# EAGLE board PCB_Docdocil_Geal (EAGLE 9.7.0)
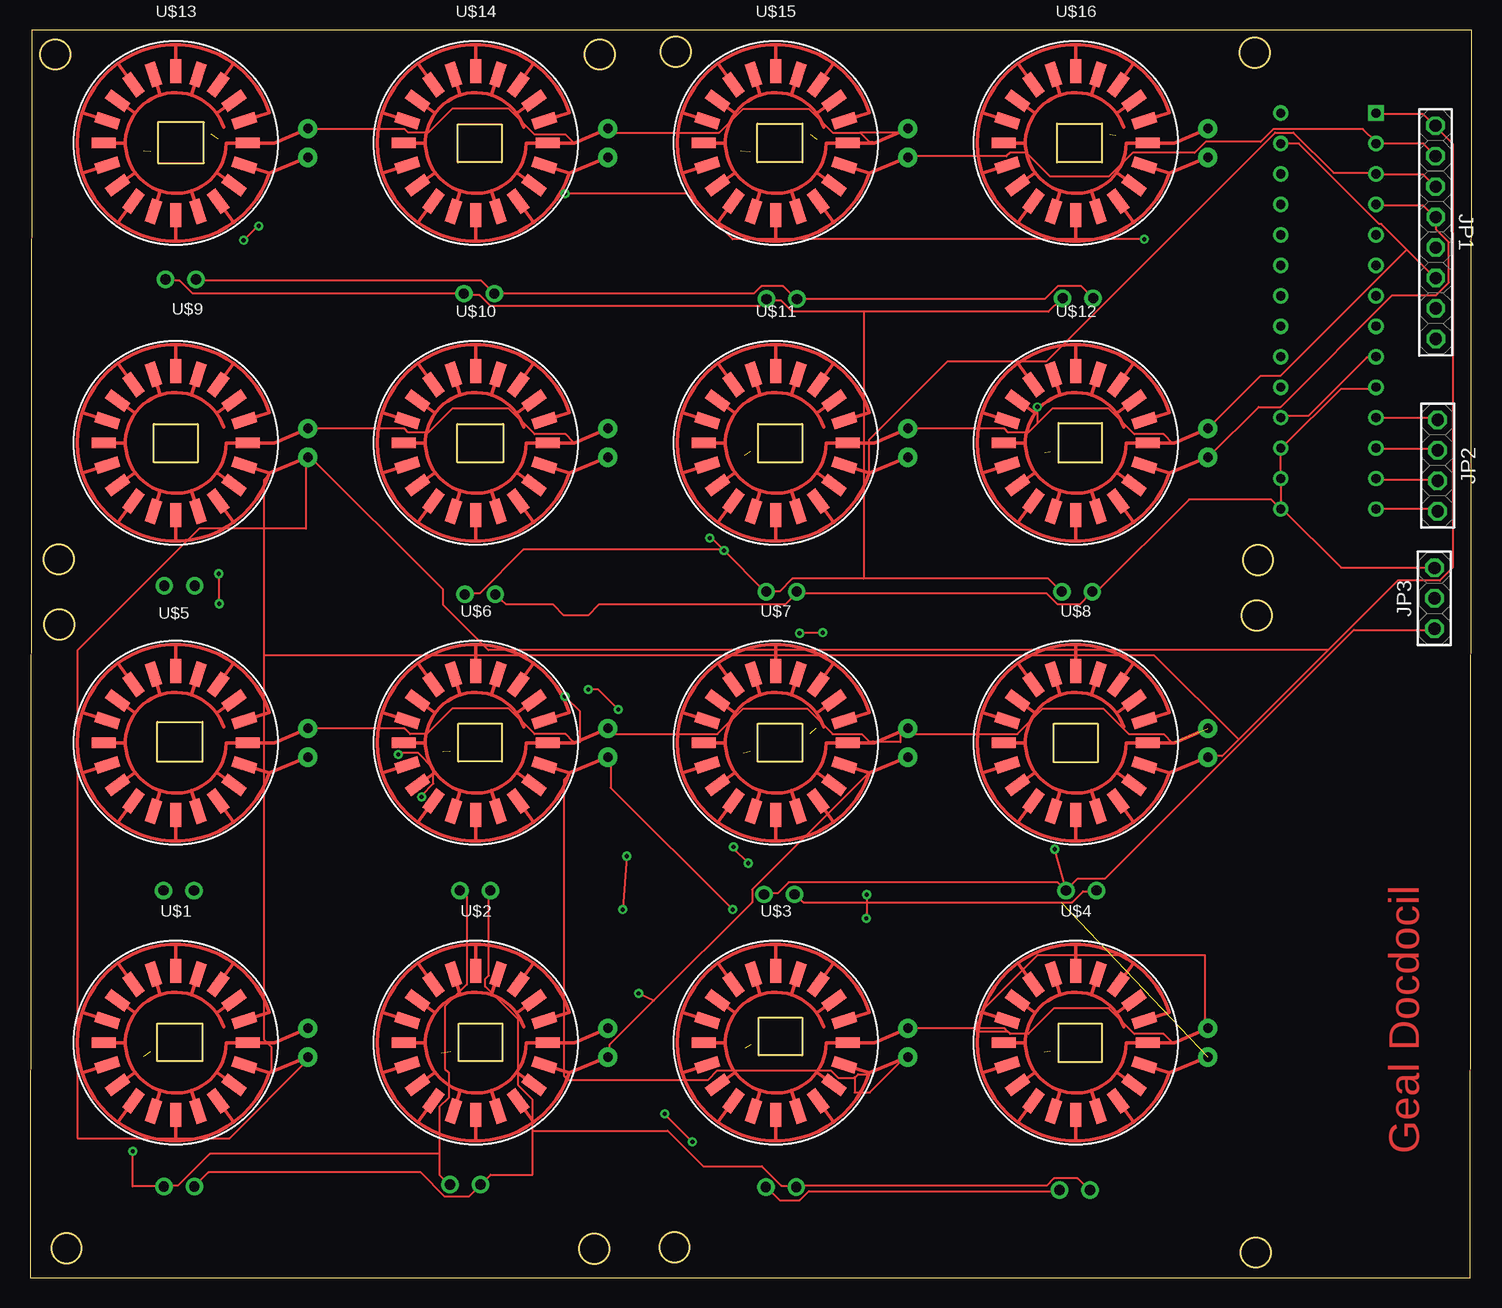
[diagram p0: board, top side]
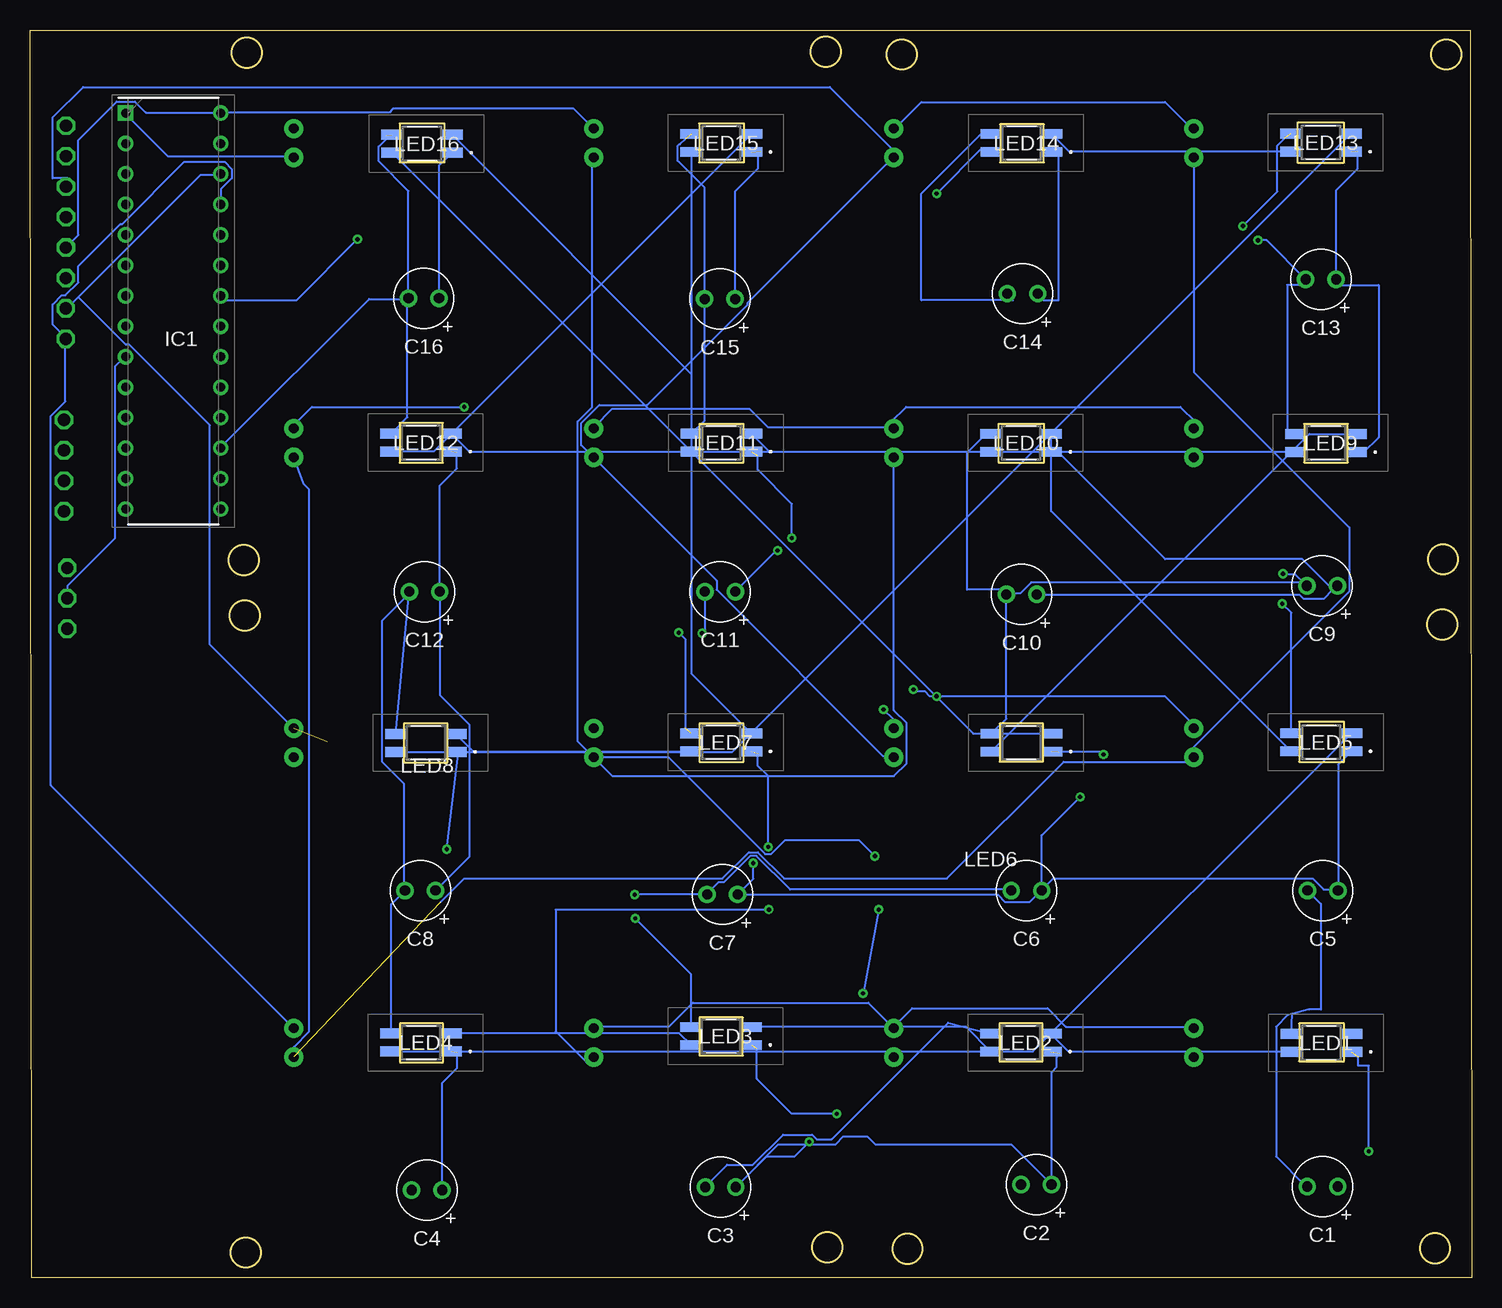
[diagram p1: board, bottom side, seen from below]

Size 120.13 x 104 mm. Coordinates in mm from the lower left corner, seen from the top.
Outline: 0,0 120,0 120.13,104 0.13,104 0,0
Outline: 10.66,96.29 10.66,92.91 14.49,92.91 14.49,96.29 10.66,96.29
Outline: 35.65,96.14 39.29,96.14 39.29,92.96 35.65,92.96 35.65,96.14
Outline: 60.62,96.2 64.38,96.2 64.38,92.96 60.62,92.96 60.62,96.2
Outline: 85.59,96.2 89.33,96.2 89.33,92.96 85.59,92.96 85.59,96.2
Outline: 89.33,71.23 89.33,67.94 85.73,67.94 85.73,71.23 89.33,71.23
Outline: 88.97,46.18 88.97,42.95 85.33,42.95 85.33,46.18 88.97,46.18
Outline: 85.71,21.17 89.31,21.17 89.31,17.95 85.71,17.95 85.71,21.17
Outline: 64.35,21.68 64.35,18.51 60.73,18.51 60.73,21.68 64.35,21.68
Outline: 35.75,21.17 39.36,21.17 39.36,18.03 35.75,18.03 35.75,21.17
Outline: 10.62,21.17 14.37,21.17 14.37,18.03 10.62,18.03 10.62,21.17
Outline: 10.62,46.33 14.37,46.33 14.37,42.99 10.62,42.99 10.62,46.33
Outline: 35.7,46.18 39.32,46.18 39.32,43.02 35.7,43.02 35.7,46.18
Outline: 60.66,46.18 64.35,46.18 64.35,43 60.66,43 60.66,46.18
Outline: 10.31,71.16 13.96,71.16 13.96,67.95 10.31,67.95 10.31,71.16
Outline: 35.62,71.16 39.43,71.16 39.43,67.95 35.62,67.95 35.62,71.16
Outline: 60.67,71.16 64.35,71.16 64.35,67.95 60.67,67.95 60.67,71.16
Outline: circle at 2.1,101.96 radius 1.25
Outline: circle at 47.49,101.96 radius 1.25
Outline: circle at 53.82,102.18 radius 1.25
Outline: circle at 102.07,102.11 radius 1.25
Outline: circle at 102.33,59.82 radius 1.25
Outline: circle at 102.24,55.2 radius 1.25
Outline: circle at 102.15,2.08 radius 1.25
Outline: circle at 3.04,2.43 radius 1.25
Outline: circle at 2.39,59.88 radius 1.25
Outline: circle at 2.45,54.43 radius 1.25
Outline: circle at 47.01,2.4 radius 1.25
Outline: circle at 53.71,2.51 radius 1.25
Copper layers (1*16): Top / Bottom
Stack-up Default Layer Stack: Top SilkScreen Epoxy Ink / Top SolderMask SR:Green 0.0254mm Dk 4.3 / Top Surface Finish Lead-Free 0.02mm / Top CuFoil:007 0.035mm / Dielectric-1 User Defined 1.5mm / Bottom CuFoil:007 0.035mm / Bottom Surface Finish Lead-Free 0.02mm / Bottom SolderMask SR:Green 0.0254mm Dk 4.3 / Bottom SilkScreen Epoxy Ink
Design rules: minimum copper width 6mil, minimum drill size 0.35mm, copper clearance wire_polygon to wire_polygon 6mil, copper clearance wire_polygon to pad_smd 6mil, copper clearance wire_polygon to via 6mil, copper clearance pad_smd to pad_smd 6mil, copper clearance pad_smd to via 6mil, copper clearance via to via 6mil, copper clearance smd to pad (same net) 6mil, copper clearance smd to via (same net) 6mil, copper clearance smd to smd (same net) 6mil, dimension clearance 40mil, via restrict clearance 0mil, restrict clearance 0mil, drill distance 6mil, keepout clearance 0mil

## Footprints (pad centres in the part's own frame; a part is rotated, then mirrored left to right if it is on the bottom)
CAPPRD254W65D500H1150B = drill 0.85 pad 1.45: 1 -1.27,0; 2 1.27,0
DIP794W56P254L3486H508Q28N = drill 0.759 pad 1.159 square: 1 -3.969,16.51 | drill 0.759 pad 1.159: 2 -3.969,13.97; 3 -3.969,11.43; 4 -3.969,8.89; 5 -3.969,6.35; 6 -3.969,3.81; 7 -3.969,1.27; 8 -3.969,-1.27; 9 -3.969,-3.81; 10 -3.969,-6.35; 11 -3.969,-8.89; 12 -3.969,-11.43; 13 -3.969,-13.97; 14 -3.969,-16.51; 15 3.969,-16.51; 16 3.969,-13.97; 17 3.969,-11.43; 18 3.969,-8.89; 19 3.969,-6.35; 20 3.969,-3.81; 21 3.969,-1.27; 22 3.969,1.27; 23 3.969,3.81; 24 3.969,6.35; 25 3.969,8.89; 26 3.969,11.43; 27 3.969,13.97; 28 3.969,16.51
1X08 = drill 1.016 octagon: 1 -8.89,0; 2 -6.35,0; 3 -3.81,0; 4 -1.27,0; 5 1.27,0; 6 3.81,0; 7 6.35,0; 8 8.89,0
1X04 = drill 1.016 octagon: 1 -3.81,0; 2 -1.27,0; 3 1.27,0; 4 3.81,0
1X03 = drill 1.016 octagon: 1 -2.54,0; 2 0,0; 3 2.54,0
SK6812MINIE = smd 1.8 x 0.82: 1 -2.5,0.75; 2 -2.5,-0.75; 3 2.5,-0.75; 4 2.5,0.75
RUBBER_RING_BUTTON = smd 2 x 0.9: 1_1 6,0; 1_6 -6,0 | smd 2 x 0.9 rotated 324: 1_2 4.854,-3.527 | smd 2 x 0.9 rotated 288: 1_3 1.854,-5.706 | smd 2 x 0.9 rotated 252: 1_4 -1.854,-5.706 | smd 2 x 0.9 rotated 216: 1_5 -4.854,-3.527 | smd 2 x 0.9 rotated 144: 1_7 -4.854,3.527 | smd 2 x 0.9 rotated 108: 1_8 -1.854,5.706 | smd 2 x 0.9 rotated 72: 1_9 1.854,5.706 | smd 2 x 0.9 rotated 36: 1_10 4.854,3.527 | drill 0.8 pad 1.6: 1_11 11,1.2; 2_11 11,-1.2 | smd 2 x 0.9 rotated 342: 2_1 5.706,-1.854 | smd 2 x 0.9 rotated 306: 2_2 3.527,-4.854 | smd 0.9 x 2: 2_3 0,-6; 2_8 0,6 | smd 2 x 0.9 rotated 234: 2_4 -3.527,-4.854 | smd 2 x 0.9 rotated 198: 2_5 -5.706,-1.854 | smd 2 x 0.9 rotated 162: 2_6 -5.706,1.854 | smd 2 x 0.9 rotated 126: 2_7 -3.527,4.854 | smd 2 x 0.9 rotated 54: 2_9 3.527,4.854 | smd 2 x 0.9 rotated 18: 2_10 5.706,1.854

## Placement (x,y rotation side)
C1  [CAPPRD254W65D500H1150B]  12.43,7.59 180 bottom
C2  [CAPPRD254W65D500H1150B]  36.27,7.74 180 bottom
C3  [CAPPRD254W65D500H1150B]  62.59,7.54 180 bottom
C4  [CAPPRD254W65D500H1150B]  87.06,7.29 180 bottom
C5  [CAPPRD254W65D500H1150B]  12.4,32.26 180 bottom
C6  [CAPPRD254W65D500H1150B]  37.09,32.26 180 bottom
C7  [CAPPRD254W65D500H1150B]  62.43,31.94 180 bottom
C8  [CAPPRD254W65D500H1150B]  87.61,32.26 180 bottom
C9  [CAPPRD254W65D500H1150B]  12.46,57.67 180 bottom
C10  [CAPPRD254W65D500H1150B]  37.5,56.95 180 bottom
C11  [CAPPRD254W65D500H1150B]  62.62,57.18 180 bottom
C12  [CAPPRD254W65D500H1150B]  87.25,57.18 180 bottom
C13  [CAPPRD254W65D500H1150B]  12.56,83.2 180 bottom
C14  [CAPPRD254W65D500H1150B]  37.43,82.02 180 bottom
C15  [CAPPRD254W65D500H1150B]  62.64,81.57 180 bottom
C16  [CAPPRD254W65D500H1150B]  87.32,81.64 180 bottom
IC1  MCP23S17-E_SP  [DIP794W56P254L3486H508Q28N]  108.2,80.57 0 bottom
JP1  PINHD-1X8  [1X08]  117.14,87.14 270.1 top
JP2  PINHD-1X4  [1X04]  117.3,67.69 270 top
JP3  PINHD-1X3  [1X03]  117.03,56.62 90 top
LED1  SK6812MINI-E  [SK6812MINIE]  12.52,19.57 180 bottom
LED2  SK6812MINI-E  [SK6812MINIE]  37.57,19.58 180 bottom
LED3  SK6812MINI-E  [SK6812MINIE]  62.55,20.13 180 bottom
LED4  SK6812MINI-E  [SK6812MINIE]  87.54,19.59 180 bottom
LED5  SK6812MINI-E  [SK6812MINIE]  12.53,44.62 180 bottom
LED6  SK6812MINI-E  [SK6812MINIE]  37.51,44.59 180 bottom
LED7  SK6812MINI-E  [SK6812MINIE]  62.53,44.62 180 bottom
LED8  SK6812MINI-E  [SK6812MINIE]  87.14,44.57 180 bottom
LED9  SK6812MINI-E  [SK6812MINIE]  12.13,69.57 180 bottom
LED10  SK6812MINI-E  [SK6812MINIE]  37.53,69.58 180 bottom
LED11  SK6812MINI-E  [SK6812MINIE]  62.52,69.59 180 bottom
LED12  SK6812MINI-E  [SK6812MINIE]  87.53,69.61 180 bottom
LED13  SK6812MINI-E  [SK6812MINIE]  12.56,94.61 180 bottom
LED14  SK6812MINI-E  [SK6812MINIE]  37.5,94.58 180 bottom
LED15  SK6812MINI-E  [SK6812MINIE]  62.53,94.58 180 bottom
LED16  SK6812MINI-E  [SK6812MINIE]  87.46,94.52 180 bottom
U$1  MIDI_B_RING  [RUBBER_RING_BUTTON]  12.15,19.58 0 top
U$2  MIDI_B_RING  [RUBBER_RING_BUTTON]  37.15,19.58 0 top
U$3  MIDI_B_RING  [RUBBER_RING_BUTTON]  62.15,19.58 0 top
U$4  MIDI_B_RING  [RUBBER_RING_BUTTON]  87.15,19.58 0 top
U$5  MIDI_B_RING  [RUBBER_RING_BUTTON]  12.15,44.58 0 top
U$6  MIDI_B_RING  [RUBBER_RING_BUTTON]  37.15,44.58 0 top
U$7  MIDI_B_RING  [RUBBER_RING_BUTTON]  62.15,44.58 0 top
U$8  MIDI_B_RING  [RUBBER_RING_BUTTON]  87.15,44.58 0 top
U$9  MIDI_B_RING  [RUBBER_RING_BUTTON]  12.15,69.58 0 top
U$10  MIDI_B_RING  [RUBBER_RING_BUTTON]  37.15,69.58 0 top
U$11  MIDI_B_RING  [RUBBER_RING_BUTTON]  62.15,69.58 0 top
U$12  MIDI_B_RING  [RUBBER_RING_BUTTON]  87.15,69.58 0 top
U$13  MIDI_B_RING  [RUBBER_RING_BUTTON]  12.15,94.58 0 top
U$14  MIDI_B_RING  [RUBBER_RING_BUTTON]  37.15,94.58 0 top
U$15  MIDI_B_RING  [RUBBER_RING_BUTTON]  62.15,94.58 0 top
U$16  MIDI_B_RING  [RUBBER_RING_BUTTON]  87.15,94.58 0 top

## Library data of the parts
C1-C16 = Tinkercad
IC1 = MCP23S17-E_SP; ARROW_PART_NUMBER: MCP23S17-E/SP; ARROW_PRICE-STOCK: https://www.arrow.com/en/products/mcp23s17-esp/microchip-technology?utm_currency=USD&region=europe; DESCRIPTION: Microchip MCP23S17-E/SO, 16-channel 16bit I/O Expander 5MHz, Serial-SPI, 28-Pin SOIC; HEIGHT: 5.08mm; MANUFACTURER_NAME: Microchip; MANUFACTURER_PART_NUMBER: MCP23S17-E/SP; MOUSER_PART_NUMBER: 579-MCP23S17-E/SP; MOUSER_PRICE-STOCK: https://www.mouser.co.uk/ProductDetail/Microchip-Technology/MCP23S17-E-SP?qs=usxtMOJb1RyzobAZrBjFZA%3D%3D
JP1 = Connector; CATEGORY: Connectors; DESCRIPTION: Header-Straight-8 Position; PACKAGE_TYPE: Through Hole; PITCH: 0.100" (2.54mm); SUBCATEGORY: Headers; TYPE: Male Pins
JP2 = Connector; CATEGORY: Connectors; DESCRIPTION: Header-Straight-4 Position; PACKAGE_TYPE: Through Hole; PITCH: 0.100" (2.54mm); SUBCATEGORY: Headers; TYPE: Male Pins
JP3 = Connector; CATEGORY: Connectors; DESCRIPTION: Header-Straight-3 Position; PACKAGE_TYPE: Through Hole; PITCH: 0.100" (2.54mm); SUBCATEGORY: Headers; TYPE: Male Pins
LED1-LED16 = SK6812MINI-E; DESCRIPTION: 3.2x2.8x1.78 mm 0.2W Intelligent external control surface mount SMD LED (MSL:5a); HEIGHT: 1.88mm; MANUFACTURER_NAME: Yellow Stone Corp.; MANUFACTURER_PART_NUMBER: SK6812MINI-E
U$1-U$16 = rubber_ring_button(F)

## Nets
+3.3V: IC1.9 IC1.18 JP3.2
+5V: C1.1 C2.1 C3.1 C4.1 C5.1 C6.1 C7.1 C8.1 C9.1 C10.1 C11.1 C12.1 C13.1 C14.1 C15.1 C16.1 JP3.1 LED1.1 LED2.1 LED3.1 LED4.1 LED5.1 LED6.1 LED7.1 LED8.1 LED9.1 LED10.1 LED11.1 LED12.1 LED13.1 LED14.1 LED15.1 LED16.1
CS: IC1.11 JP2.1
GND: C1.2 C2.2 C3.2 C4.2 C5.2 C6.2 C7.2 C8.2 C9.2 C10.2 C11.2 C12.2 C13.2 C14.2 C15.2 C16.2 IC1.10 IC1.15 IC1.16 IC1.17 JP3.3 LED1.3 LED2.3 LED3.3 LED4.3 LED5.3 LED6.3 LED7.3 LED8.3 LED9.3 LED10.3 LED11.3 LED12.3 LED13.3 LED14.3 LED15.3 LED16.3
GPA1: IC1.22 LED14.4
GPA4: IC1.25 JP1.8 U$1.1_11 U$2.1_11 U$3.1_11 U$4.1_11
GPA5: IC1.26 JP1.7 U$5.1_11 U$6.1_11 U$7.1_11 U$8.1_11
GPA6: IC1.27 JP1.6 U$9.1_11 U$10.1_11 U$11.1_11 U$12.1_11
GPA7: IC1.28 JP1.5 U$13.1_11 U$14.1_11 U$15.1_11
GPB0: IC1.1 JP1.1 U$1.2_11 U$8.2_11 U$9.2_11 U$16.2_11
GPB1: IC1.2 JP1.2 U$2.2_11 U$7.2_11 U$10.2_11 U$15.2_11
GPB2: IC1.3 JP1.3 U$3.2_11 U$6.2_11 U$11.2_11 U$14.2_11
GPB3: IC1.4 JP1.4 U$4.2_11 U$5.2_11 U$12.2_11 U$13.2_11
N$1: LED1.4 LED2.2
N$2: LED2.4 LED3.2
N$3: LED3.4 LED4.2
N$4: LED5.4 LED10.2
N$5: LED10.4 LED11.2
N$6: LED11.4 LED16.2
N$7: LED6.4 LED9.2
N$8: LED9.4 LED12.2
N$9: LED12.4 LED15.2
N$10: LED7.4 LED8.2
N$11: LED8.4 LED13.2
N$12: LED13.4 LED14.2
N$13: LED7.2 LED15.4
N$14: LED6.2 LED16.4
N$15: LED4.4 LED5.2
SCK: IC1.12 JP2.2
SI: IC1.13 JP2.3
SO: IC1.14 JP2.4

## Tracks (layer width: path | path; a pad name or v marks a point on that pad's centre or on a via)
+3.3V
  Top 0.152: IC1.18 104.38,71.82 106.51,71.82 111.39,76.7 112.15,76.7 IC1.9
  Bottom 0.152: JP3.2 117.02,56.73 117.02,57.65 113.06,61.61 113.06,75.93 112.3,76.7 IC1.9
+5V  (via drill 0.35)  (10 unrouted)
  Top 0.152: C13.1 11.41,83.1 12.48,83.1 13.54,82.03 36.1,82.03 C14.1 36.25,81.88 37.47,81.88 38.39,80.96 60.79,80.96 61.25,81.42 C15.1 61.4,81.42 62.62,81.42 63.53,80.51 69.48,80.51 | 69.48,58.25 84.87,58.25 85.93,57.19 C12.1 | 69.48,58.25 63.53,58.25 62.47,57.19 61.4,57.19 C11.1 61.25,57.19 57.76,60.67 41.11,60.67 37.47,57.04 36.25,57.04 C10.1 | 69.48,80.51 84.87,80.51 85.93,81.57 C16.1 | 69.48,80.51 69.48,58.25 | C7.1 61.25,32.04 62.31,32.04 63.23,32.96 85.63,32.96 86.24,32.35 C8.1 | JP3.1 117.02,53.99 110.32,53.99 89.59,33.26 87.31,33.26 86.39,32.35 C8.1 | C4.1 85.78,7.2 64.9,7.2 64.14,6.44 62.47,6.44 61.4,7.51 C3.1 | 34.12,10.31 14.98,10.31 12.33,7.66 11.26,7.66 C1.1 8.56,7.59 v8.56,10.53 | C2.1 34.88,7.81 34.12,8.57 34.12,10.31 | 34.12,10.31 34.12,14.21 34.88,14.97 34.88,17.11 34.58,17.41 34.58,22.59 36.4,24.42 36.4,31.74 35.95,32.19 C6.1 | C8.1 v85.39,35.71 | v32.63,40.06 32.63,40.2 33.61,41.18 33.61,42.46 32.36,43.71 30.79,43.71 v30.68,43.6 | v30.68,43.6 | v57.83,60.6 56.8,61.64 v56.64,61.64 | v59.86,34.54 58.62,35.78 v58.62,35.91 | v55.2,11.31 52.9,13.61 v52.9,13.65
  Bottom 0.152: 11.56,57.34 11.26,57.65 C9.1 11.56,57.34 | 11.56,57.34 12.33,56.58 14,56.58 14.31,56.88 36.1,56.88 C10.1 | C6.1 35.8,32.35 34.88,33.26 13.24,33.26 12.33,32.35 11.26,32.35 C5.1 11.13,42.77 LED5.1 | C6.1 35.95,32.19 36.86,31.28 38.84,31.28 39.45,31.89 61.09,31.89 C7.1 59.86,33.24 v59.86,34.54 | C8.1 86.24,32.35 83.5,35.09 83.5,46.06 85.93,48.5 85.93,57.04 C12.1 85.99,66.02 84.56,67.45 84.56,68.79 | LED9.1 9.02,68.77 7.75,70.04 7.75,82.74 11.56,82.74 C13.1 11.29,90.63 9.49,92.42 9.49,93.87 9.47,93.89 | 11.56,57.34 14.1,59.88 25.53,59.88 34.42,68.77 LED10.1 | LED14.1 34.42,94.17 34.42,81.47 35.69,81.47 C14.1 | v8.56,10.53 8.56,17.65 9.45,17.65 9.45,18.39 | 34.26,18.68 34.58,18.37 34.58,17.55 35,17.12 C2.1 38.35,11.1 49.69,11.1 50.35,11.75 52.35,11.75 53.01,11.1 57.76,11.1 C3.1 58.75,10.11 56.4,10.11 v55.2,11.31 | 59.57,19.11 59.57,16.58 56.64,13.65 v52.9,13.65 | 84.53,18.78 84.54,18.76 84.54,17.46 85.79,16.22 C4.1 | v85.39,35.71 84.5,43.3 LED8.1 | C15.1 61.37,90.56 59.45,92.48 59.45,93.89 59.25,93.89 | C6.1 35.82,36.86 v32.63,40.06 | v30.68,43.6 30.89,43.82 34.39,43.82 | C11.1 57.93,60.6 v57.83,60.6 | v56.64,61.64 56.64,64.49 59.5,67.35 59.5,68.52 | v58.62,35.91 58.62,41.79 59.49,42.66 59.49,43.66 59.45,43.7 59.44,43.7 | LED16.1 86.05,92.67 C16.1
CS
  Top 0.152: IC1.11 112.3,71.67 117.02,71.67 117.18,71.51 JP2.1
GND  (via drill 0.35)  (4 unrouted)
  Top 0.152: C8.2 88.83,32.19 87.76,32.19 86.85,31.28 64.45,31.28 63.84,31.89 C7.2 | C4.2 88.22,7.35 87.31,8.27 85.33,8.27 84.72,7.66 63.99,7.66 C3.2 63.84,7.66 62.62,7.66 60.98,9.29 56.09,9.29 53.14,12.24 41.89,12.24 | C1.2 14.86,8.76 32.56,8.76 34.58,6.74 36.56,6.74 37.47,7.66 C2.2 37.62,7.81 38.39,8.57 41.89,8.57 41.89,12.24 | 41.89,12.24 41.89,14.82 40.67,16.04 40.67,21.53 37.93,24.27 37.93,24.88 38.23,25.18 38.23,32.19 C6.2 | C13.2 13.85,83.1 37.62,83.1 C14.2 38.84,82.03 60.33,82.03 60.94,82.64 62.77,82.64 63.84,81.57 C15.2 63.99,81.57 84.56,81.57 85.63,82.64 87.61,82.64 88.53,81.72 C16.2 | IC1.15 104.22,64.2 104.22,66.48 IC1.16 104.22,66.64 104.22,69.08 IC1.17 104.38,69.23 109.25,74.1 112.15,74.1 IC1.10 | JP3.3 109.25,59.17 104.38,64.05 IC1.15 | C10.2 39.69,56.12 43.59,56.12 44.5,55.21 46.5,55.21 47.42,56.12 62.92,56.12 63.84,57.04 C11.2 63.99,57.04 84.72,57.04 85.63,56.12 87.46,56.12 88.37,57.04 C12.2 88.91,57.19 96.59,64.87 103.42,64.87 IC1.15 | v69.74,31.92 69.74,29.97 v69.69,29.93 | v17.8,86.47 18.99,87.66 v19.06,87.66 | v15.77,56.16 15.77,58.61 v15.72,58.67 | v64.13,53.71 64.17,53.75 v66.06,53.75
  Bottom 0.152: C6.2 38.39,32.35 56.8,32.35 59.6,35.15 60.11,35.15 62.3,32.96 62.77,32.96 63.68,32.04 C7.2 69.72,31.94 v69.74,31.92 | C1.2 13.85,7.66 16.29,10.1 16.29,20.92 15.32,21.89 14.93,21.99 | C10.2 38.69,57.04 37.62,57.04 36.71,57.95 14,57.95 13.85,57.8 13.85,57.79 | 13.85,57.79 C9.2 | 88.68,81.57 91.88,81.57 104.22,69.23 IC1.17 | 88.68,81.57 C16.2 88.59,90.58 91.09,93.07 91.09,94.27 90.5,94.86 90.5,95.2 | LED9.3 15.37,70.04 15.37,82.74 14.1,82.74 C13.2 17.09,86.47 v17.8,86.47 | LED10.3 40.77,70.04 42.04,68.77 42.04,57.34 38.23,57.34 C10.2 | LED14.3 40.77,95.44 45.85,90.36 45.85,81.47 38.23,81.47 C14.2 | LED2.3 43.62,21.25 53.34,11.52 54.6,11.52 54.6,11.56 54.95,11.91 57.37,11.91 59.89,9.4 62.05,9.4 63.63,7.81 C3.2 | LED3.3 65.05,25.28 v69.69,29.93 | LED4.3 90.04,31.11 C8.2 88.98,32.35 88.98,41.19 90.81,43.01 90.81,54.75 88.53,57.04 C12.2 LED8.3 | C5.2 12.56,31.16 12.56,22.34 13.57,22.34 14.93,21.99 | LED1.3 14.93,21.99 | v19.06,87.66 16.19,90.53 16.19,94.36 15.65,94.9 15.65,94.95 | 65.54,94.9 65.98,94.47 66.02,94.47 66.16,94.34 66.16,93.09 63.91,90.85 C15.2 63.91,71.45 LED11.3 | LED12.3 88.68,71.71 88.68,81.57 | LED6.3 38.77,46.57 C10.2 | LED5.3 15.03,55.42 v15.77,56.16 | v15.72,58.67 14.72,58.67 13.85,57.79 | C11.2 63.89,53.94 v64.13,53.71 | v66.06,53.75 65.52,53.21 65.52,45.83
GPA1  (via drill 0.35)
  Top 0.152: v44.58,90.36 54.74,90.36 58.55,86.55 v92.84,86.55
  Bottom 0.152: v44.58,90.36 40.77,94.17 LED14.4 | v92.84,86.55 97.92,81.47 104.27,81.47 IC1.22
GPA4
  Top 0.152: 81.44,20.54 81.67,20.31 83.19,20.31 85.33,22.44 89.9,22.44 92.03,20.31 94.47,20.31 95.23,19.55 95.35,19.58 | 81.44,20.54 81.21,20.76 73.29,20.76 U$3.1_11 | 81.44,20.54 81.41,20.51 78.87,20.51 78.87,21.78 83.95,26.86 97.92,26.86 97.92,20.51 U$4.1_11
  Bottom 0.152: IC1.25 104.22,89.5 104.22,90.72 103.31,91.63 103.31,92.39 103.92,93 107.27,93 112.45,87.82 112.6,87.82 116.11,84.32 116.11,82.94 117.18,81.88 117.48,81.88 118.24,81.11 118.24,79.44 117.18,78.37 JP1.8 117.18,78.22 117.18,73.04 118.4,71.82 118.4,41.03 98.28,20.92 U$4.1_11 | U$1.1_11 23.3,20.92 33.81,20.92 35.34,22.44 46.62,22.44 48.14,20.92 U$2.1_11 48.29,20.92 50.27,22.9 64.9,22.9 66.88,20.92 73.13,20.92 U$3.1_11
GPA5  (via drill 0.35)  (1 unrouted)
  Top 0.152: U$5.1_11 23.3,45.76 31.22,45.76 31.68,45.3 33.05,45.3 35.19,47.43 39.91,47.43 42.04,45.3 44.63,45.3 45.24,44.69 45.35,44.58 45.85,44.64 45.85,47.18 v44.58,48.45 | 69.93,44.69 70.24,44.69 70.35,44.58 | 69.93,44.69 69.32,45.3 66.88,45.3 64.75,47.43 59.42,47.43 57.28,45.3 48.75,45.3 48.29,45.76 U$6.1_11 | 69.93,44.69 69.98,44.64 72.52,44.64 72.52,45.91 U$7.1_11 73.29,45.76 73.74,45.3 82.28,45.3 84.41,47.43 89.44,47.43 91.57,45.3 94.47,45.3 95.23,44.54 95.35,44.58 95.38,44.64 | v49.01,47.36 47.34,49.03 v46.51,49.03
  Bottom 0.152: 116.11,81.72 117.02,80.81 JP1.7 | 116.11,81.72 105.9,91.94 104.38,91.94 IC1.26 | 116.11,81.72 112.15,77.76 111.84,77.76 105.14,71.06 105.14,52.77 98.28,45.91 U$8.1_11 | U$5.1_11 22.99,45.91 25.53,48.45 v44.58,48.45 45.13,48.45 45.56,48.88 46.36,48.88 v46.51,49.03 | U$6.1_11 48.15,46.5 v49.01,47.36
GPA6  (via drill 0.35)
  Top 0.152: 114.74,85.69 117.02,83.4 JP1.6 | 114.74,85.69 112.6,87.82 112.45,87.82 105.75,94.53 104.38,94.53 IC1.27 | U$9.1_11 23.3,70.75 31.22,70.75 31.53,70.45 33.2,70.45 35.19,72.43 39.91,72.43 42.04,70.29 44.63,70.29 45.24,69.68 45.35,69.58 | 84,71.26 85.17,72.43 89.9,72.43 92.03,70.29 94.47,70.29 95.23,69.53 95.35,69.58 | 84,71.26 83.19,70.45 81.52,70.45 81.21,70.75 73.29,70.75 U$11.1_11 | 114.74,85.69 104.22,75.17 102.55,75.17 98.28,70.9 U$12.1_11 | v83.95,72.58 83.95,71.31 84,71.26
  Bottom 0.152: U$11.1_11 73.13,70.9 71.61,72.43 60.18,72.43 58.66,70.9 48.29,70.9 U$10.1_11 48.39,71.31 47.12,72.58 24.26,72.58 22.99,71.31 U$9.1_11 | v83.95,72.58 96.65,72.58 97.92,71.31 U$12.1_11
GPA7
  Top 0.152: U$13.1_11 23.3,95.75 31.22,95.75 31.53,95.44 33.2,95.44 35.19,97.42 39.91,97.42 42.04,95.29 44.63,95.29 45.24,94.68 45.35,94.58 | 69.17,95.44 69.93,94.68 70.24,94.68 70.35,94.58 | 69.17,95.44 66.88,95.44 64.9,97.42 59.42,97.42 57.44,95.44 48.6,95.44 48.29,95.75 U$14.1_11 | 69.17,95.44 72.52,95.44 U$15.1_11
  Bottom 0.152: JP1.5 117.02,85.99 116.11,86.91 116.11,94.83 112.91,98.03 111.39,98.03 110.47,97.12 104.38,97.12 IC1.28 104.22,97.12 90.2,97.12 89.9,97.42 74.81,97.42 73.29,95.9 U$15.1_11 | U$13.1_11 22.99,95.44 25.53,97.98 45.85,97.98 48.39,95.44 U$14.1_11
GPB0
  Top 0.152: 19.49,51.85 19.49,66.48 19.95,66.94 19.95,67.05 | 19.49,51.85 19.49,19.85 20.1,19.24 20.1,17.26 19.95,17.05 | IC1.1 112.3,96.96 116.11,96.96 117.02,96.05 JP1.1 117.18,95.9 118.55,94.53 118.55,59.17 117.48,58.1 113.98,58.1 108.17,52.3 | 108.17,52.3 100.72,44.84 | 100.72,44.84 99.35,43.47 98.28,43.47 U$8.2_11 | 19.49,51.85 93.71,51.85 100.72,44.84 | 22.99,68.77 22.99,62.42 14.1,62.42 3.94,52.26 3.94,11.62 16.64,11.62 22.99,17.97 U$1.2_11 | 22.99,68.77 34.42,57.34 34.42,56.07 38.19,52.3 108.17,52.3 | 22.99,68.77 U$9.2_11
  Bottom 0.152: U$16.2_11 98.28,93.46 108.64,93.46 112.15,96.96 IC1.1
GPB1  (via drill 0.35)
  Top 0.152: JP1.2 117.02,93.61 116.11,94.53 112.3,94.53 IC1.2 112.15,94.68 111.08,95.75 103.61,95.75 102.55,94.68 97.97,94.68 97.06,93.76 91.88,93.76 89.9,91.78 85.02,91.78 83.04,93.76 81.67,93.76 81.36,93.46 73.29,93.46 U$15.2_11 | 51.98,23.09 60.18,31.28 60.18,32.35 69.93,42.1 | 51.98,23.09 48.29,19.39 48.29,18.48 U$2.2_11 | 69.93,42.1 69.95,42.05 69.98,42.1 69.93,42.1 | v49.72,35.13 v49.39,30.67 | v50.71,23.69 51.98,23.09
  Bottom 0.152: U$10.2_11 48.14,68.31 48.14,47.28 47.07,46.22 47.07,42.86 48.14,41.8 71.61,41.8 73.13,43.32 U$7.2_11 | U$15.2_11 73.29,93.31 73.29,72.58 74.5,71.36 74.5,44.69 73.29,43.47 U$7.2_11 | v49.39,30.67 v50.71,23.69 | v49.72,35.13 51.06,36.46 57.21,36.46 58.37,35.3 58.87,35.3 66.96,43.38 U$7.2_11
GPB2  (via drill 0.35)
  Top 0.152: JP1.3 117.02,91.02 116.11,91.94 112.3,91.94 IC1.3 112.15,92.09 108.64,92.09 105.29,95.44 103.77,95.44 84.72,76.39 76.49,76.39 69.93,69.84 69.93,67.09 69.95,67.05 | 68.71,16.65 69.02,16.95 69.93,16.95 69.95,17.05 | 68.71,16.65 67.34,16.65 66.73,17.26 57.28,17.26 56.52,16.5 44.79,16.5 44.48,16.8 44.48,41.49 44.94,41.95 44.95,42.05 | 68.71,16.65 68.71,15.43 69.98,15.43 72.52,17.97 U$3.2_11 | 68.71,16.7 68.71,16.65 | v58.55,30.67 48.39,40.83 48.39,43.37 U$6.2_11
  Bottom 0.152: U$6.2_11 48.29,43.47 49.05,43.47 62.92,57.34 62.92,58.1 73.13,68.31 U$11.2_11 73.29,68.47 74.2,69.38 74.2,71.21 72.68,72.73 68.71,72.73 60.33,81.11 60.33,81.27 48.29,93.31 U$14.2_11 48.39,94.17 53.47,99.25 115.7,99.25 118.24,96.71 118.24,91.63 116.97,91.63 JP1.3 | v58.55,30.67 76.33,30.67 76.33,20.51 73.79,17.97 U$3.2_11
GPB3  (1 unrouted)
  Top 0.152: IC1.4 112.3,89.34 116.11,89.34 117.02,88.43 JP1.4 117.18,88.28 117.18,87.36 118.24,86.3 118.24,82.94 117.18,81.88 113.52,81.88 104.22,72.58 102.39,72.58 98.28,68.47 U$12.2_11
  Bottom 0.152: U$13.2_11 23.15,93.31 23.15,75.48 10.19,62.52 10.19,57.19 23.15,44.23 23.15,43.47 U$5.2_11 23.54,42.99 33.99,42.99 43.72,33.26 57.28,33.26 59.48,35.46 60.23,35.46 62.43,33.26 83.95,33.26 85.93,31.28 | U$4.2_11 98.13,18.48 98.13,19.24 96.91,20.46 96.91,65.74 97.32,66.15 U$12.2_11
N$1
  Bottom 0.152: LED1.4 33.55,18.82 LED2.2
N$2
  Bottom 0.152: LED2.4 42.12,20.88 LED3.2
N$3
  Bottom 0.152: LED3.4 66.01,20.34 LED4.2
N$4
  Bottom 0.152: LED5.4 35.04,63.88 LED10.2
N$5
  Bottom 0.152: LED10.4 58.51,68.83 LED11.2
N$6
  Bottom 0.152: LED16.2 65.02,75.33 LED11.4
N$7
  Bottom 0.152: LED6.4 13.53,70.32 LED9.2
N$8
  Bottom 0.152: LED9.4 83.5,68.82 LED12.2
N$9
  Bottom 0.152: LED15.2 86.5,68.86 LED12.4
N$10
  Bottom 0.152: LED8.2 83.19,43.87 LED7.4
N$11
  Bottom 0.152: LED8.4 61.6,43.82 LED13.2
N$12
  Bottom 0.152: LED13.4 33.53,93.86 LED14.2
N$13
  Bottom 0.152: LED15.4 65.03,50.36 LED7.2
N$14
  Bottom 0.152: LED16.4 41.53,45.34 LED6.2
N$15
  Bottom 0.152: LED4.4 36.56,18.84 LED5.2
SCK
  Top 0.152: IC1.12 112.3,69.08 117.18,69.08 JP2.2
SI
  Top 0.152: IC1.13 112.3,66.48 117.18,66.48 JP2.3
SO
  Top 0.152: IC1.14 112.3,64.05 117.02,64.05 117.18,63.89 JP2.4

## Text on the board
Top: Geal Docdocil